# EAGLE board Addon-mapleCUx_HM-RFM69-RFM95-V15-001-TX-Fix (EAGLE 9.2.2)
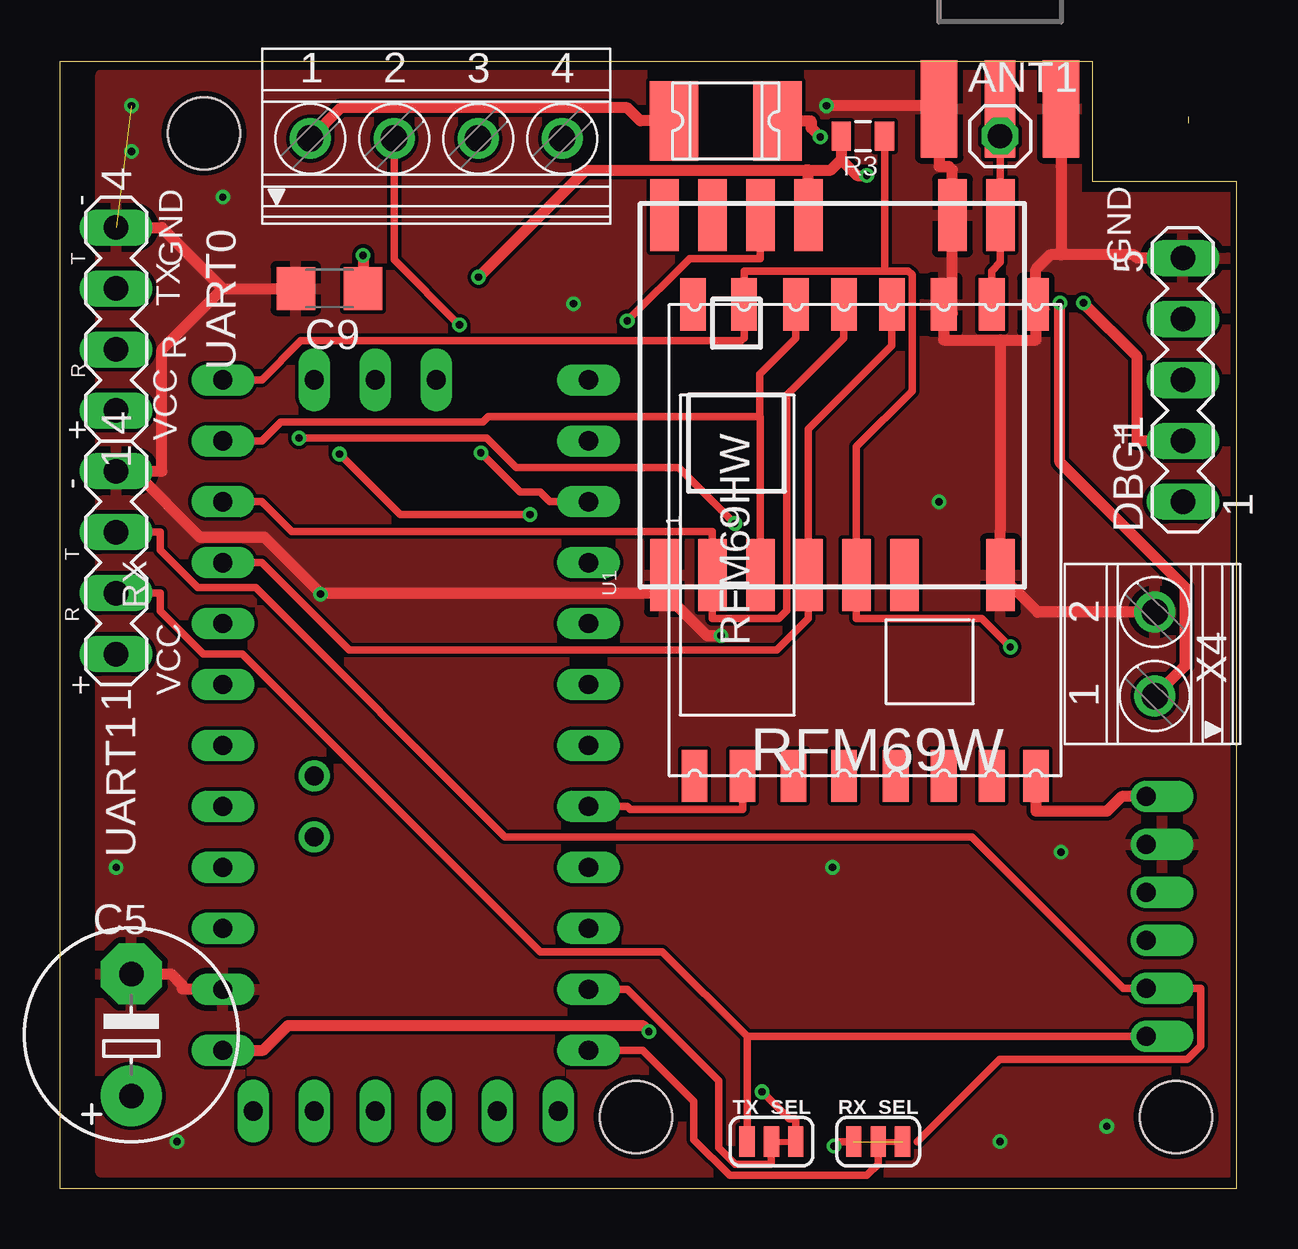
[diagram p0: board, top side]
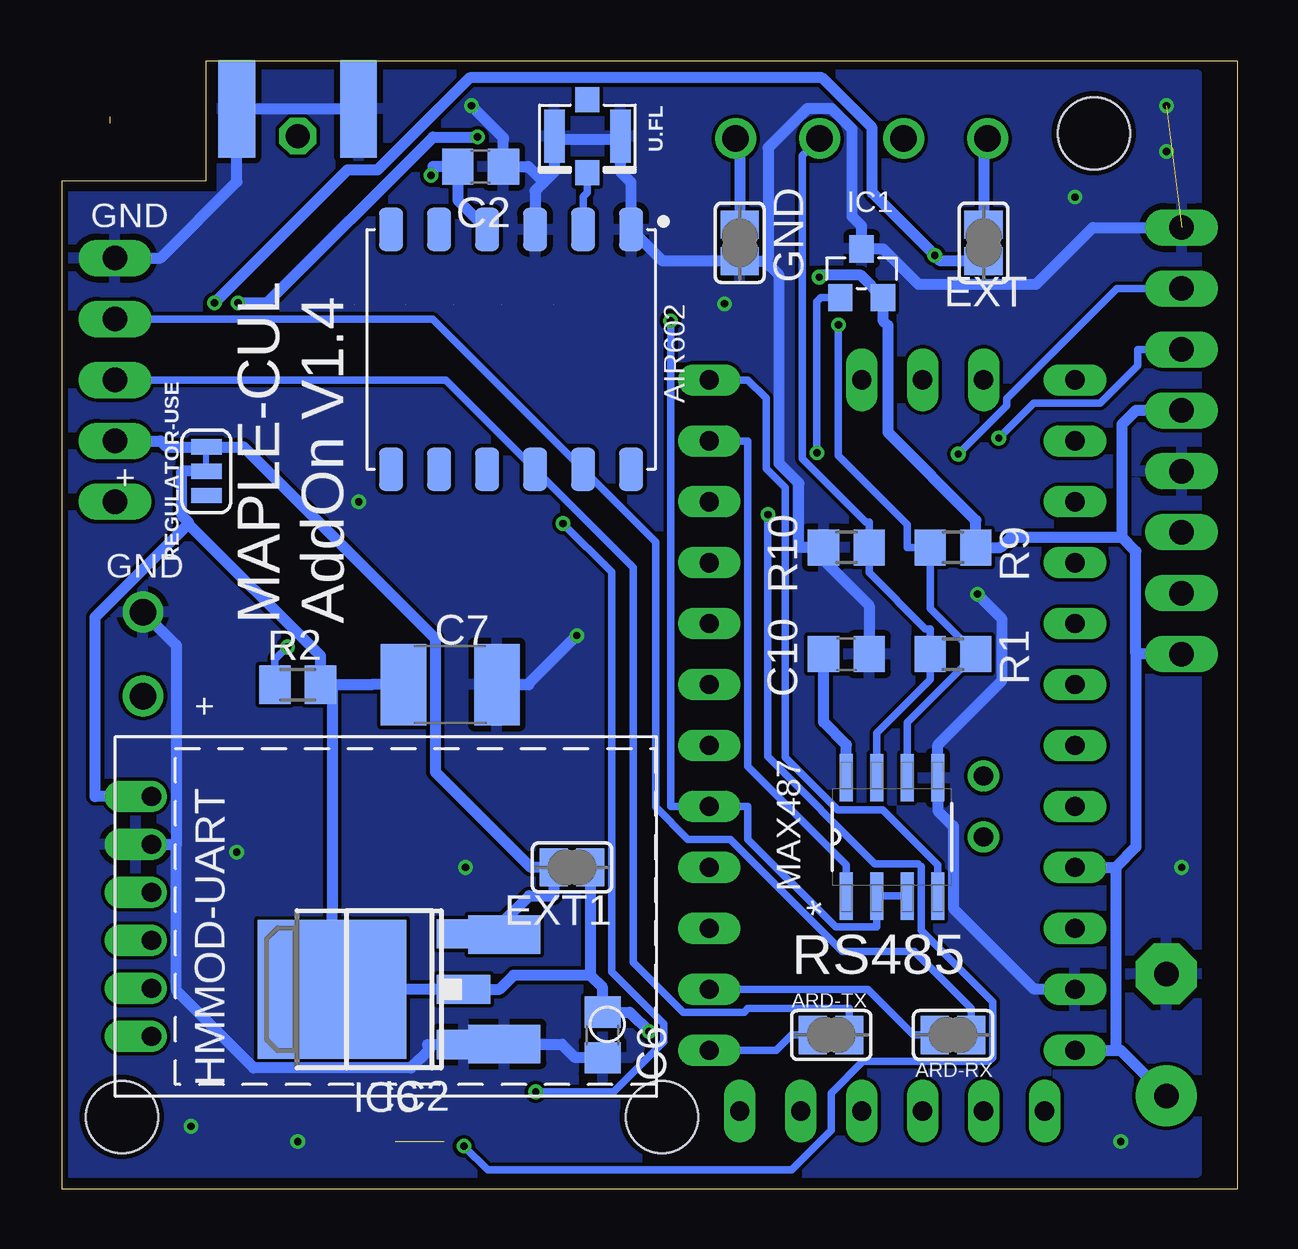
[diagram p1: board, bottom side, seen from below]

Size 49 x 47 mm. Coordinates in mm from the lower left corner, seen from the top.
Outline: 47,44.7 47,44.41
Outline: 0,0 0,47 43,47 43,42 49,42 49,0 0,0
Copper layers (1*16): Top 0.035mm / dielectric 1.5mm / Bottom 0.035mm
Design rules "SeeedStudio_2layer_DRU_no_angle_20140221": minimum track width 6mil, minimum drill 12mil, track to track 6mil, track to pad 6mil, pad to pad 6mil, via to via 6mil, smd to smd 0mil, copper to edge 10mil, drill to drill 10mil, minimum pad ring 10mil, minimum via ring 6mil, stop-mask expansion 2mil, vias tented up to drill 100mil, thermal gap 10mil
Net classes: 0 default: width 0.305 mm; 1 PWR: width 0.457 mm
Holes 3 mm at 6,44 24,3 46.5,3
tRestrict: area 0.4,2 to 1.1,47.1
bRestrict: area 0.4,0.7 to 1.1,46.4

## Footprints (pad centres in the part's own frame; a part is rotated, then mirrored left to right if it is on the bottom)
MODULE12P-2.0-10X12MM = smd 1.8 x 1: 1 -5,5; 2 -5,3; 3 -5,1; 4 -5,-1; 5 -5,-3; 6 -5,-5; 7 5,-5; 8 5,-3; 9 5,-1; 10 5,1; 11 5,3; 12 5,5
1X01 = drill 1.016 octagon: 1 0,0
SJ = smd 1.168 x 1.6: 1 -0.762,0; 2 0.762,0
C0805 = smd 1.3 x 1.5: 1 -0.95,0; 2 0.95,0
E5-8,5 = drill 1.016 pad 2.54: + -2.54,0 | drill 1.016 pad 2.54 octagon: - 2.54,0
C1812 = smd 1.9 x 3.4: 1 -1.95,0; 2 1.95,0
C1206 = smd 1.6 x 1.8: 1 -1.4,0; 2 1.4,0
MA05-1 = drill 1.016 long: 1 -5.08,0; 2 -2.54,0; 3 0,0; 4 2.54,0; 5 5.08,0
1812L = smd 2.03 x 3.3: P$1 -2.16,0; P$2 2.16,0
HM-MOD-UART-DIL = drill 0.8 offset: 1 0,12; 2 0,10; 3 0,8; 4 0,6; 5 0,4; 6 0,2
SOT23 = smd 1.016 x 1.143: 1 -0.889,-1.016; 2 0.889,-1.016; 3 0,1.016
DPACK = smd 1.6 x 3: 1 -2.28,-4.8; 3 2.28,-4.8 | smd 5.8 x 6.2: 4 0,2.38
SOT223 = smd 1.219 x 2.235: 1 -2.311,-3.099; 2 0,-3.099; 3 2.311,-3.099 | smd 3.6 x 2.2: TAB 0,3.099
R0805 = smd 1.3 x 1.5: 1 -0.95,0; 2 0.95,0
M0805 = smd 1.3 x 1.6: 1 -0.95,0; 2 0.95,0
0805 = smd 0.8 x 1.2: 1 -0.9,0; 2 0.9,0
SMT-JUMPER_3_1-NC_TRACE_SILK = smd 0.635 x 1.27: 1 -1.016,0; 2 0,0; 3 1.016,0
RFM = smd 2.184 x 1.067: ANT 19.651,2.889; DIO0 0,13.27; DIO1 0,11.143; DIO2 0,9.047; DIO3 0,6.889; DIO4 0,4.889; DIO5 0,2.889; GNDA 19.651,4.889; GNDB 19.651,1.048; MISO 19.651,9.047; MOSI 19.651,11.047; NC 19.651,15.334; NSS 19.651,13.206; RESET 0,15.27; SCK 19.651,7.048; VCC 0,1.048
SOIC127P600X175-8N = smd 1.981 x 0.533: 1 -2.464,1.905; 2 -2.464,0.635; 3 -2.464,-0.635; 4 -2.464,-1.905; 5 2.464,-1.905; 6 2.464,-0.635; 7 2.464,0.635; 8 2.464,1.905
RFM69HCW-XXXS2 = smd 3 x 1.2: 3.3V 7.5,1; ANT 7.5,-7; DIO0 7.5,3; DIO1 7.5,5; DIO2 7.5,7; GND_1 7.5,-5; GND_2 -7.5,-7; GND_3 -7.5,7; MISO -7.5,5; MOSI -7.5,3; NSS -7.5,-1; RESET -7.5,-3; SCK -7.5,1
ABK-PRO-MINI = drill 0.8 long: A0 10.16,-3.81; A1 10.16,-6.35; A2 10.16,-8.89; A3 10.16,-11.43; A6 3.81,-21.59; A7 6.35,-21.59; D2 -5.08,-3.81; D3 -5.08,-6.35; D4 -5.08,-8.89; D5 -5.08,-11.43; D6 -5.08,-13.97; D7 -5.08,-16.51; D8 -5.08,-19.05; D9 -5.08,-21.59; D10 10.16,-21.59; D11 10.16,-19.05; D12 10.16,-16.51; D13 10.16,-13.97; DTR 8.89,8.89; GND 10.16,3.81; GND1 -5.08,-1.27; GND2 -3.81,8.89; GND3 -1.27,8.89; GND4 1.27,-21.59; RAW 10.16,6.35; RST 10.16,1.27; RST1 -5.08,1.27; RX1 -5.08,3.81; RX1-1 3.81,8.89; TX0 -5.08,6.35; TX0-1 6.35,8.89; VCC 10.16,-1.27; VCC1 1.27,8.89 | drill 0.8: A4 6.35,-5.08; A5 6.35,-2.54
U.FL = smd 2.2 x 0.85: 1 0,1.375; 2 0,-1.375 | smd 1.05 x 1: FEED 1.525,0; NC -1.525,0
MA04-1 = drill 1.016 long: 1 -3.81,0; 2 -1.27,0; 3 1.27,0; 4 3.81,0
SMA_EDGELAUNCH = smd 4.064 x 1.524: GND@1 2.032,-2.54; GND@2 2.032,2.54 | smd 4.064 x 1.524 bottom: GND@3 2.032,2.54; GND@4 2.032,-2.54 | smd 4.064 x 1.27: P 2.032,0
1751248 = drill 1.1 pad 1.7: 1 -1.75,-0.1; 2 1.75,-0.1
1751264 = drill 1.1 pad 1.7: 1 -5.25,-0.1; 2 -1.75,-0.1; 3 1.75,-0.1; 4 5.25,-0.1

## Placement (x,y rotation side)
AIR602  [MODULE12P-2.0-10X12MM]  30.28,34.99 270 bottom
ANT1  [1X01]  39.17,43.88 0 top
ARD-RX  [SJ]  11.87,6.41 180 bottom
ARD-TX  [SJ]  16.94,6.41 0 bottom
C2  22pF  [C0805]  31.55,42.61 180 bottom
C5  220uF  [E5-8,5]  2.98,6.41 90 top
C6  22pF  [C0805]  26.47,6.41 270 bottom
C7  [C1812]  32.82,21.02 180 bottom
C9  0.1uF  [C1206]  11.23,37.53 180 top
C10  22p  [C0805]  16.31,22.29 180 bottom
DBG1  [MA05-1]  46.79,33.72 90 top
EXT  [SJ]  10.59,39.44 90 bottom
EXT1  [SJ]  27.74,13.4 180 bottom
F1  1812L  [1812L]  27.74,44.52 0 top
GND  [SJ]  20.75,39.44 90 bottom
HMMOD-UART  HM-MOD-UARTDIL  [HM-MOD-UART-DIL]  45.27,4.35 0 bottom
IC1  ATSHA204A  [SOT23]  15.67,38.16 0 bottom
IC2  LD117ADT50TR  [DPACK]  35.36,8.32 90 bottom
IC6  LM1117MPX-ADJ  [SOT223]  35.36,8.32 90 bottom
R1  150R  [R0805]  11.87,22.29 180 bottom
R2  10k  [M0805]  39.17,21.02 0 bottom
R3  10k  [0805]  33.45,43.88 180 top
R9  330R  [R0805]  11.87,26.73 180 bottom
R10  330R  [R0805]  16.31,26.73 180 bottom
REGULATOR-USE  JUMPER-SMT_3_1-NC_TRACE_SILK  [SMT-JUMPER_3_1-NC_TRACE_SILK]  42.98,29.91 90 bottom
RFM69W  RFM69HW  [RFM]  41.71,17.21 90 top
RS1  MAX487ECSA+  [SOIC127P600X175-8N]  14.41,14.67 90 bottom
RX_SEL  JUMPER-SMT_3_1-NC_TRACE_SILK  [SMT-JUMPER_3_1-NC_TRACE_SILK]  34.09,1.97 0 top
TX_SEL  JUMPER-SMT_3_1-NC_TRACE_SILK  [SMT-JUMPER_3_1-NC_TRACE_SILK]  29.64,1.97 0 top
U1  RFM69HCW  [RFM69HCW-XXXS2]  32.19,33.09 90 top
U$2  ABK-PRO-MINI  [ABK-PRO-MINI]  16.94,12.13 180 top
U.FL  U.FL  [U.FL]  27.11,43.88 270 bottom
UART0  [MA04-1]  2.34,36.26 90 top
UART1  [MA04-1]  2.34,26.1 90 top
X2  [SMA_EDGELAUNCH]  39.17,47.05 270 top
X4  1751248  [1751248]  45.52,22.29 90 top
X7  1751264  [1751264]  15.67,43.88 0 top

## Library data of the parts
AIR602 = AIR602
ANT1 = pinhead
ARD-RX ARD-TX EXT EXT1 GND = jumper
C2 C5-C7 C9 C10 R1 R2 R9 R10 = rcl
DBG1 UART0 UART1 = con-lstb; OC_FARNELL: unknown; OC_NEWARK: unknown
F1 = ptc-littlefuse
HMMOD-UART = wireless
IC1 = Sensor
IC2 = v-reg
IC6 = lm1117
R3 U1 = doug
REGULATOR-USE RX_SEL TX_SEL = SparkFun-Jumpers
RFM69W = hoperf
RS1 = Maxim_By_element14_Batch_1; MPN: MAX487ECSA+; OC_FARNELL: 9724532; OC_NEWARK: 68K4803; PACKAGE: SOIC-8; SUPPLIER: Maxim
U$2 = Arduino-clone
U.FL = SparkFun-Connectors; PROD_ID: CONN-09193; SF_ID: WRL-09144
X2 = adafruit
X4 = con-phoenix-350; OC_FARNELL: unknown; OC_NEWARK: unknown
X7 = con-phoenix-350; MPN: 1751264; OC_FARNELL: unknown; OC_NEWARK: 10R0934

## Nets
1W: R1.1 R9.2 RS1.6 X7.2
2W: R1.2 R10.1 RS1.7 X7.3
AN: AIR602.2 U.FL.FEED
ANT: ANT1.1 RFM69W.ANT U1.ANT X2.P
CE-A: RS1.4 U$2.D9
CSN-A: R2.1 R3.1 RFM69W.NSS U1.NSS U$2.D10
D7-ATSHA-ARDU: IC1.1 U$2.D7
EXT [PWR]: EXT.2 F1.P$1 X7.1
GD [PWR]: GND.2 X7.4
GND [PWR]: AIR602.1 AIR602.3 C2.1 C5.- C6.2 C7.1 C9.2 C10.1 DBG1.5 GND.1 HMMOD-UART.2 IC1.3 IC2.1 IC6.1 R10.2 RFM69W.GNDA RFM69W.GNDB RS1.5 U1.GND_1 U1.GND_2 U1.GND_3 U$2.GND U.FL.1 U.FL.2 UART0.4 UART1.4 X2.GND@1 X2.GND@2 X2.GND@3 X2.GND@4 X4.2
IN [PWR]: C9.1 DBG1.2 EXT1.2 EXT.1 IC2.3 IC6.3 REGULATOR-USE.3
IN2 [PWR]: DBG1.1
IRQ-A: RFM69W.DIO0 RS1.2 RS1.3 U1.DIO0 U$2.D2
MISO-A: RFM69W.MISO U1.MISO U$2.D12
MOSI-A: RFM69W.MOSI U1.MOSI U$2.D11
N$2: U1.RESET
N$14: U1.DIO2
N$15: U1.DIO1
N$45 [PWR]: F1.P$2 X4.1
RO-A: RS1.1 U$2.D8
RX: ARD-RX.2 TX_SEL.2 U$2.RX1
RX0: RX_SEL.1 RX_SEL.3 UART0.3
RX1: HMMOD-UART.5 UART1.3
RX_DBG: AIR602.11 ARD-RX.1 DBG1.4
SCK-A: RFM69W.SCK U1.SCK U$2.D13
TX: ARD-TX.1 RX_SEL.2 U$2.TX0
TX0: TX_SEL.3 UART0.2
TX1: HMMOD-UART.6 TX_SEL.1 UART1.2
TX_DBG: AIR602.10 ARD-TX.2 DBG1.3
VCC [PWR]: AIR602.4 C2.2 C5.+ C6.1 C7.2 EXT1.1 HMMOD-UART.1 IC1.2 IC2.4 IC6.2 IC6.TAB R2.2 R3.2 R9.1 REGULATOR-USE.2 RFM69W.VCC U1.3.3V U$2.RAW U$2.VCC UART0.1 UART1.1
VDD [PWR]: C10.2 RS1.8
VIN2 [PWR]: REGULATOR-USE.1

## Tracks (layer width: path | path; a pad name or v marks a point on that pad's centre or on a via)
1W  (via drill 0.3 pad 0.61)
  Top 0.305: X7.2 13.92,38.73 v16.64,36.01
  Bottom 0.305: v16.64,36.01 16.64,30.56 13.77,27.69 13.77,26.73 R9.2 12.81,24.19 R1.1 13.77,19.43 RS1.6
2W
  Bottom 0.305: X7.3 18.14,43.06 18.14,30.43 15.5,27.79 15.36,27.79 R10.1 15.36,25.68 13.03,23.34 12.81,23.34 R1.2 12.81,21.23 15.04,19.01 RS1.7
AN
  Bottom 0.305: U.FL.FEED 27.11,41.52 27.28,41.35 AIR602.2
ANT  (1 unrouted)
  Top 0.305: RFM69W.ANT 38.82,38.26 39.19,38.62 U1.ANT 39.19,42.39 39.17,42.41 ANT1.1 X2.P
CE-A
  Bottom 0.305: RS1.4 12.5,13.5 14.8,15.8 16.67,15.8 18.85,17.98 18.85,29.22 19.65,30.02 19.65,32.96 20.41,33.72 U$2.D9
CSN-A  (via drill 0.3 pad 0.61)  (1 unrouted)
  Top 0.305: 34.36,38.26 34.36,42.98 R3.1 | v39.6,22.59 38.41,23.78 33.19,23.78 U1.NSS 33.19,30.94 35.5,33.25 35.5,38.1 35.34,38.26 34.36,38.26 | 34.36,38.26 28.5,38.26 RFM69W.NSS 28.5,36.16 28.5,35.46 28.39,35.35 10.03,35.35 8.4,33.72 U$2.D10
  Bottom 0.305: R2.1 40.12,22.12 40.06,22.12 v39.6,22.59
D7-ATSHA-ARDU  (via drill 0.3 pad 0.61)
  Top 0.305: U$2.D7 20.41,28.64 20.02,29.04 19.18,29.04 v17.53,30.69
  Bottom 0.305: IC1.1 17.38,37.15 17.53,36.99 v17.53,30.69
EXT
  Top 0.457: F1.P$1 24.18,44.52 23.64,45.06 11.71,45.06 X7.1
  Bottom 0.457: X7.1 10.59,43.61 EXT.2
GD
  Bottom 0.457: X7.4 20.75,43.61 GND.2
GND  (via drill 0.3 pad 0.61)  (3 unrouted)
  Top 0.457: 25.19,24.83 26.95,23.06 v27.54,23.06 | 10.85,24.83 25.19,24.83 | 10.85,24.83 v10.85,24.79 | 3.08,29.91 5.83,27.16 8.52,27.16 10.85,24.83 | U1.GND_3 25.19,24.83 | 3.08,29.91 4.24,29.91 | UART1.4 3.08,29.91 | v31.94,45.15 36.5,45.15 X2.GND@1 36.63,42.61 37.04,42.61 37.19,42.47 U1.GND_1 37.19,36.49 36.82,36.12 | 41.71,38.93 41.26,38.93 40.66,38.34 RFM69W.GNDB 40.66,35.39 39.19,35.39 | 41.71,38.93 44.75,38.93 44.89,38.8 DBG1.5 | 41.71,38.93 41.71,42.61 X2.GND@2 | 6.78,37.53 C9.2 | 6.78,37.53 4.24,40.07 UART0.4 | 4.24,29.91 | 4.24,29.91 4.24,34.99 6.78,37.53 | X4.2 40.73,24.04 U1.GND_2 39.19,27.47 39.19,35.39 | 39.19,35.39 36.82,35.39 36.82,36.12 | U$2.GND 5.1,8.32 5.1,8.48 4.63,8.95 C5.- | RFM69W.GNDA 36.82,36.12
  Bottom 0.457: C7.1 29.54,21.02 29.54,21.06 v27.54,23.06 | v10.85,24.79 9.84,23.78 9.84,21.16 12.5,18.51 RS1.5 12.5,15.76 11.85,15.11 11.85,11.7 8.47,8.32 U$2.GND | v31.94,45.15 30.6,43.81 30.6,43.74 C2.1 29.57,42.61 28.92,41.96 | 19.71,38.67 19.57,38.81 19.57,43.39 17.94,45.03 16.93,45.03 16.07,44.17 16.07,40.53 15.67,40.13 IC1.3 14.79,39.18 13.31,37.71 8.41,37.71 6.04,40.07 UART0.4 | 28.92,41.96 29.28,41.6 AIR602.3 | 28.92,41.96 28.48,42.4 U.FL.2 28.34,43.74 25.73,43.74 | 19.71,38.67 19.11,38.08 19.11,30.24 18.29,29.42 18.29,26.73 17.78,26.73 | 17.78,26.73 15.36,24.32 C10.1 | R10.2 17.78,26.73 | 19.71,38.67 19.73,38.67 20.16,38.67 GND.1 23.96,38.67 AIR602.1 25.28,41.95 25.73,42.4 25.73,43.66 25.73,43.74 | 44.23,14.35 44.23,8.26 41.01,5.04 34.46,5.04 33.76,5.74 33.76,6.01 IC6.1 30.58,6.01 30.56,6.02 | HMMOD-UART.2 44.23,14.35 | X4.2 44.23,22.65 44.23,14.35 | X2.GND@2 | X2.GND@2 X2.GND@1 | X2.GND@1 | X2.GND@2 41.71,41.98 44.89,38.8 DBG1.5 | U.FL.1 25.73,43.74 | 30.56,6.02 28.16,6.02 27.6,5.46 C6.2 | 30.56,6.02 IC2.1
  other vias: 2.98,45.15 2.98,43.24 6.78,41.34 36.63,28.64 32.19,13.4 41.71,14.04 43.61,2.61 39.17,1.97 4.88,1.97 2.34,13.4 21.39,36.9
  pour Bottom: 1.7,0.7 1.7,46.42 42.34,46.42 42.34,41.34 48.69,41.34 48.69,0.7
  pour Top: 1.7,46.42 42.34,46.42 42.34,41.34 48.69,41.34 48.69,0.7 1.7,0.7
IN  (via drill 0.3 pad 0.61)
  Top 0.457: DBG1.2 44.89,31.18 44.89,34.68 v42.64,36.93 | v12.63,38.91 C9.1
  Bottom 0.457: v42.64,36.93 37.11,42.46 35.85,42.46 32,46.31 17.32,46.31 15.24,44.23 15.24,41.52 v12.63,38.91 12.39,38.67 11.78,38.67 EXT.1 | 30.56,11.19 29.53,12.22 28.5,12.22 EXT1.2 29.47,13.4 33.44,17.37 33.44,22.94 41.42,30.93 REGULATOR-USE.3 44.63,30.93 44.89,31.18 DBG1.2 | 30.56,11.19 30.76,10.99 30.76,10.63 IC6.3 | IC2.3 30.56,11.19
IRQ-A  (via drill 0.3 pad 0.61)
  Top 0.305: v23.64,36.18 26.24,38.78 29.19,38.78 U1.DIO0 | RFM69W.DIO0 28.44,15.81 23.77,15.81 23.64,15.94 U$2.D2
  Bottom 0.305: v23.64,36.18 23.64,15.94 U$2.D2 20.41,15.94 20.41,14.57 16.75,10.91 15.04,10.91 RS1.2 RS1.3
MISO-A  (1 unrouted)
  Top 0.305: U$2.D12 8.4,28.64 9.65,27.39 27.19,27.39 U1.MISO 27.19,24.68 27.19,23.78 29.95,23.78 30.28,24.11 30.28,33.08 32.66,35.46 RFM69W.MISO
MOSI-A  (1 unrouted)
  Top 0.305: 29.15,32.19 17.84,32.19 17.62,31.97 9.19,31.97 8.4,31.18 U$2.D11 | 29.15,32.19 29.19,32.16 29.19,27.39 U1.MOSI | 29.15,32.19 29.15,33.96 30.66,35.46 RFM69W.MOSI
N$45  (via drill 0.3 pad 0.61)
  Top 0.457: X4.1 46.89,21.81 46.89,25.06 41.66,30.29 v41.66,36.93 | v31.67,43.85 31.3,44.23 31.3,44.52 F1.P$2
  Bottom 0.457: v41.66,36.93 40.44,36.93 33.53,43.85 v31.67,43.85
RO-A
  Bottom 0.305: U$2.D8 20.41,31.18 20.41,17.6 16.31,13.5 RS1.1
RX
  Top 0.305: U$2.RX1 23.64,8.32 27.45,4.51 27.45,1.71 28.13,1.03 29.64,1.03 TX_SEL.2
  Bottom 0.305: ARD-RX.2 13.52,6.41 15.42,8.32 U$2.RX1
RX0  (via drill 0.3 pad 0.61)  (1 unrouted)
  Top 0.305: v19.58,28.11 14.17,28.11 v11.65,30.63 | RX_SEL.1 32.45,1.97 32.26,1.78 v32.25,1.78
  Bottom 0.305: UART0.3 5.05,37.53 9.63,32.95 9.63,32.65 v11.65,30.63 | v19.58,28.11 19.58,18.01 15.12,13.55 13.32,13.55 13.2,13.43 13.2,10.77 10.21,7.79 10.21,5.46 10.37,5.31 15.62,5.31 16.94,3.99 16.94,2.44 18.59,0.79 31.26,0.79 v32.25,1.78
RX1
  Top 0.305: UART1.3 4.17,27.37 4.17,26.63 5.74,25.06 8.15,25.06 18.53,14.68 37.98,14.68 44.31,8.35 HMMOD-UART.5 47.53,8.35 47.53,5.95 46.97,5.39 39.15,5.39 35.73,1.97
RX_DBG
  Bottom 0.305: DBG1.4 33.55,36.26 AIR602.11 24.26,26.97 24.26,15.91 22.92,14.57 21.16,14.57 16.48,9.89 13.47,9.89 11.1,7.52 ARD-RX.1
SCK-A  (1 unrouted)
  Top 0.305: U$2.D13 8.4,26.1 12.05,22.45 29.86,22.45 31.19,23.78 U1.SCK 31.19,31.67 34.66,35.15 RFM69W.SCK
TX
  Top 0.305: U$2.TX0 24.28,5.78 26.42,3.65 26.42,2.04 27.9,0.56 33.62,0.56 34.09,1.03 RX_SEL.2
  Bottom 0.305: ARD-TX.1 18.6,6.41 19.23,5.78 U$2.TX0
TX0  (via drill 0.3 pad 0.61)
  Top 0.305: v28.12,27.73 25.78,30.07 19.01,30.07 17.79,31.3 v9.96,31.3 | TX_SEL.3 30.66,2.91 30.39,2.91 v29.25,4.05
  Bottom 0.305: v28.12,27.73 26.09,25.7 26.09,9.05 23.92,6.88 23.92,6.13 26.01,4.05 v29.25,4.05 | v9.96,31.3 8.49,32.76 5.73,32.76 4.17,34.32 4.17,34.99 UART0.2
TX1
  Top 0.305: 28.63,6.35 TX_SEL.1 | 28.63,6.35 25.1,9.88 20.02,9.88 7.6,22.29 5.97,22.29 4.17,24.09 4.17,24.83 UART1.2 | 28.63,6.35 44.31,6.35 HMMOD-UART.6
TX_DBG
  Bottom 0.305: ARD-TX.2 16.18,7.52 20.41,7.52 20.57,7.36 23.1,7.36 25.18,9.44 25.18,25.89 AIR602.10 33.01,33.72 DBG1.3
VCC  (via drill 0.3 pad 0.61)
  Top 0.457: v24.53,6.56 24.28,6.82 9.51,6.82 8.47,5.78 U$2.RAW | HMMOD-UART.1 44.23,16.35 43.62,15.74 40.66,15.74 RFM69W.VCC | 31.19,42.36 31.19,42.47 | U1.3.3V 31.19,42.36 | v17.44,38 21.9,42.47 31.08,42.47 31.19,42.36 | 32.56,42.9 33.21,42.24 v33.61,42.24 | 31.19,42.47 | 31.19,42.47 32.12,42.47 32.56,42.9 | R3.2 32.56,42.9
  Bottom 0.457: v24.53,6.56 25.34,7.36 C6.1 26.47,8.4 26.98,8.9 | UART0.1 4.24,32.45 4.82,31.87 4.82,27.15 | 4.82,27.15 9.47,27.15 9.88,26.73 R9.1 10.91,27.87 14.59,31.54 14.59,36 14.79,36.2 IC1.2 15.74,38.1 17.34,38.1 v17.44,38 | 4.24,22.29 4.24,26.57 4.82,27.15 | EXT1.1 26.98,8.9 | 26.98,8.9 30.18,8.9 30.76,8.32 IC6.2 IC2.4 | 37.74,21.02 36.1,21.02 C7.2 | 37.74,21.02 R2.2 38.22,22.21 43.72,27.72 | 37.74,21.02 37.74,11.6 IC2.4 | IC2.4 IC6.TAB | v33.61,42.24 33.53,42.32 33.53,42.61 C2.2 32.5,41.21 AIR602.4 | UART1.1 4.24,22.29 | 4.24,22.29 4.24,14.25 5.1,13.4 | 43.72,27.72 | 43.72,27.72 43.72,27.79 44,28.07 44,29.91 REGULATOR-USE.2 | 43.72,27.72 47.61,23.83 47.61,16.35 HMMOD-UART.1 | 5.1,5.78 4.88,5.78 C5.+ | 5.1,13.4 5.1,5.78 | U$2.RAW 5.1,5.78 | U$2.VCC 5.1,13.4
VDD
  Bottom 0.457: RS1.8 16.31,18.51 17.26,19.46 C10.2

## Text on the board
tNames: GND | - | T | GND | TX | R | R | + | VCC | + | - | T | R | RX | VCC | +
bNames: GND | + | GND | MAPLE-CUL / AddOn V1.4 | + | MAX487 | RS485